# EAGLE board cpu-68000 (EAGLE 9.5.2), part 1 of 2
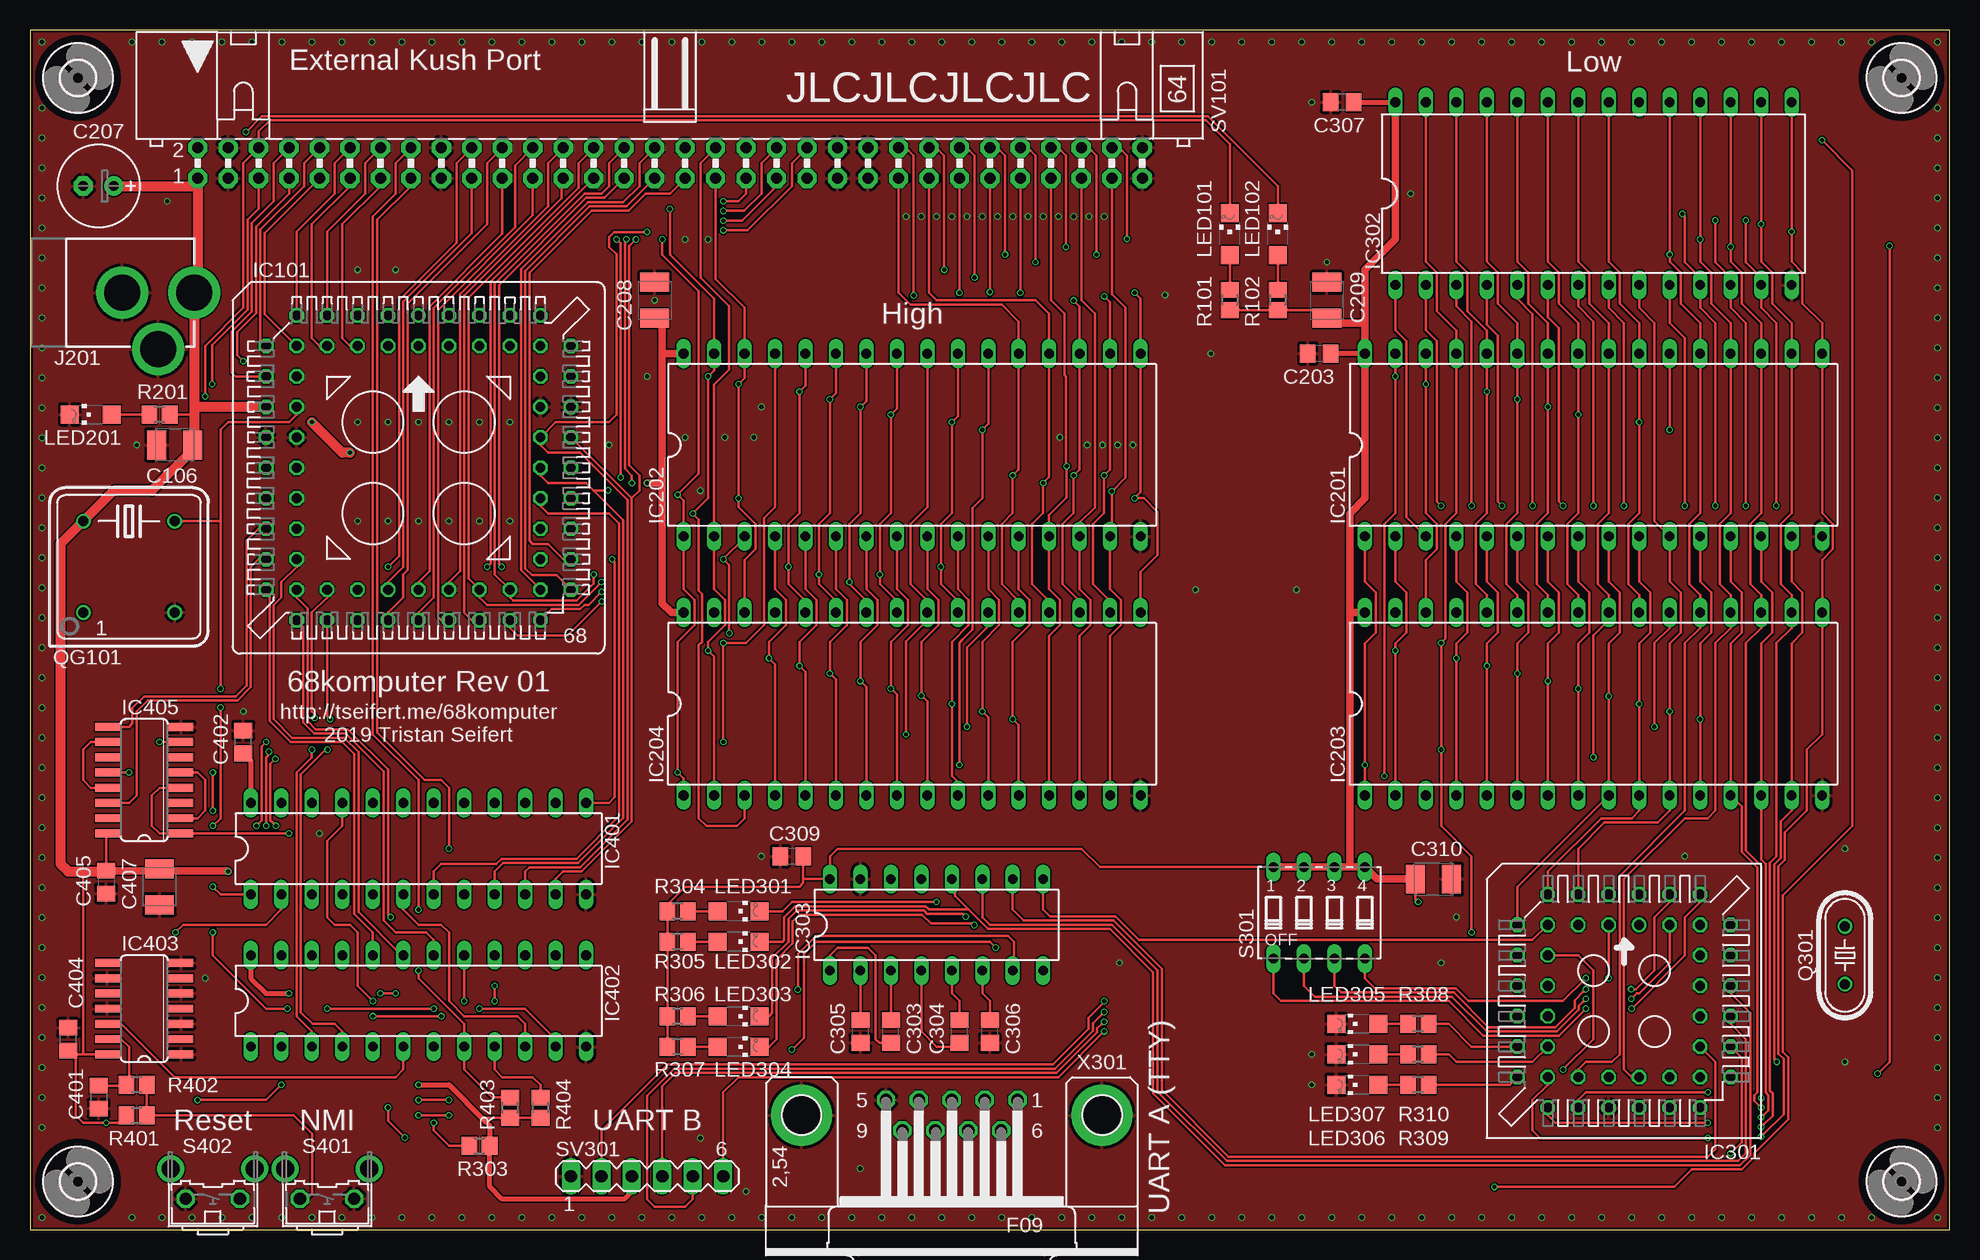
[diagram p0: board, top side]
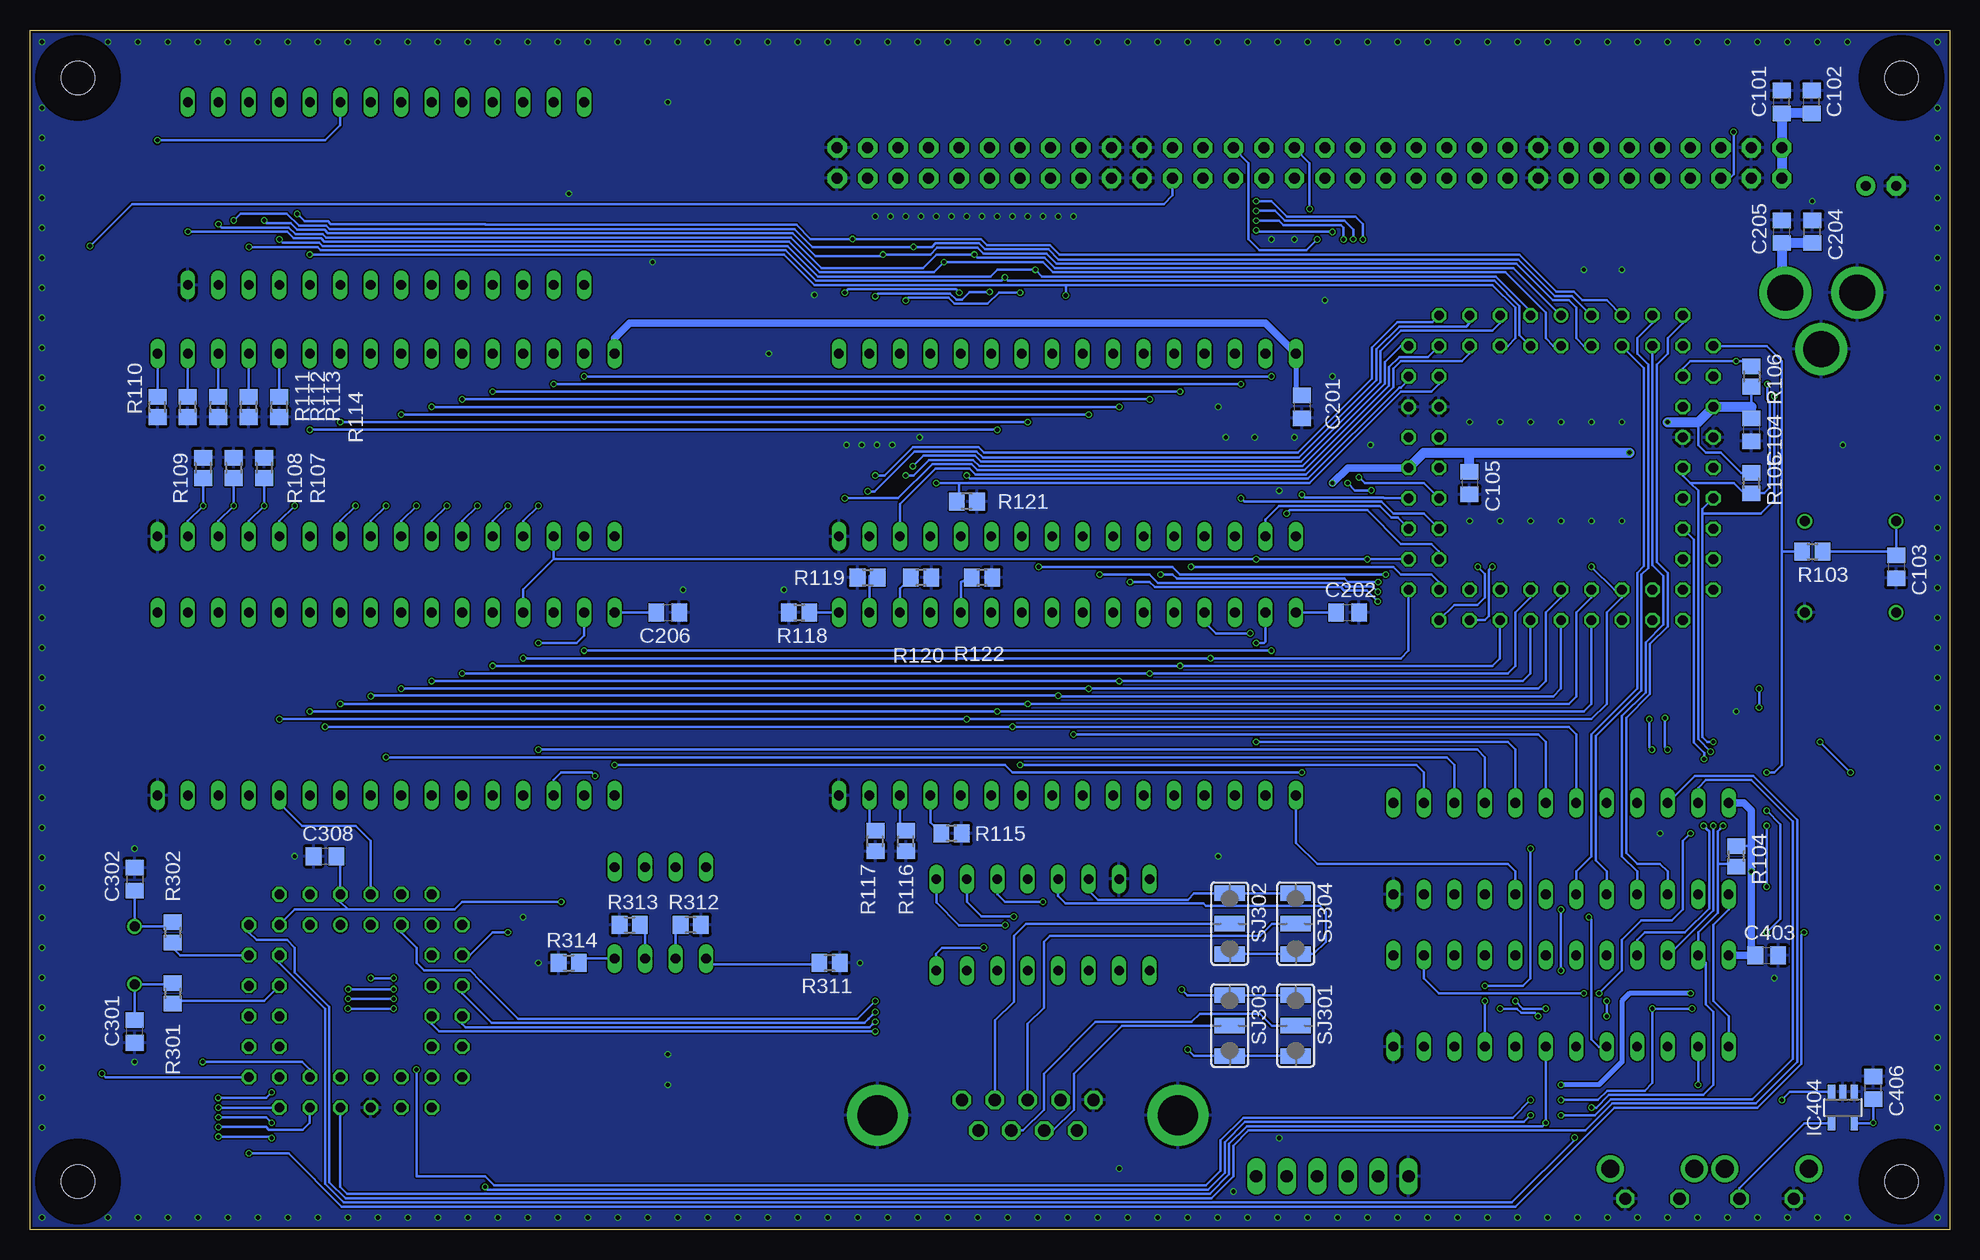
[diagram p1: board, bottom side, seen from below]

Size 160 x 100 mm. Coordinates in mm from the lower left corner, seen from the top.
Outline: 0,0 160,0 160,100 0,100 0,0
Copper layers (1*16): Top 0.035559375mm / dielectric 1.6mm / Bottom 0.035559375mm
Design rules "jlcpcb2layer *": minimum track width 5mil, minimum drill 12mil, track to track 5mil, track to pad 5mil, pad to pad 5mil, via to via 5mil, smd to smd 5mil, copper to edge 8mil, drill to drill 6mil, minimum pad ring 5mil, minimum via ring 3mil, stop-mask expansion 2.5mil, vias tented up to drill 0mil, thermal gap 10mil
Net classes: 0 default: width 0.203 mm

## Footprints (pad centres in the part's own frame; a part is rotated, then mirrored left to right if it is on the bottom)
C0805 = smd 1.3 x 1.5: 1 -0.95,0; 2 0.95,0
SMC_B = smd 1.6 x 2.4: + -1.5,0; - 1.5,0
E2,5-7 = drill 0.813 pad 1.6: + -1.27,0 | drill 0.813 pad 1.6 octagon: - 1.27,0
2,8 = hole 2.8: 0,0
PLCC68SOCK = drill 0.813: 1 0,12.7 | drill 0.813 octagon: 2 0,10.16; 3 -2.54,12.7; 4 -2.54,10.16; 5 -5.08,12.7; 6 -5.08,10.16; 7 -7.62,12.7; 8 -7.62,10.16; 9 -10.16,12.7; 10 -12.7,10.16; 11 -10.16,10.16; 12 -12.7,7.62; 13 -10.16,7.62; 14 -12.7,5.08; 15 -10.16,5.08; 16 -12.7,2.54; 17 -10.16,2.54; 18 -12.7,0; 19 -10.16,0; 20 -12.7,-2.54; 21 -10.16,-2.54; 22 -12.7,-5.08; 23 -10.16,-5.08; 24 -12.7,-7.62; 25 -10.16,-7.62; 26 -12.7,-10.16; 27 -10.16,-12.7; 28 -10.16,-10.16; 29 -7.62,-12.7; 30 -7.62,-10.16; 31 -5.08,-12.7; 32 -5.08,-10.16; 33 -2.54,-12.7; 34 -2.54,-10.16; 35 0,-12.7; 36 0,-10.16; 37 2.54,-12.7; 38 2.54,-10.16; 39 5.08,-12.7; 40 5.08,-10.16; 41 7.62,-12.7; 42 7.62,-10.16; 43 10.16,-12.7; 44 12.7,-10.16; 45 10.16,-10.16; 46 12.7,-7.62; 47 10.16,-7.62; 48 12.7,-5.08; 49 10.16,-5.08; 50 12.7,-2.54; 51 10.16,-2.54; 52 12.7,0; 53 10.16,0; 54 12.7,2.54; 55 10.16,2.54; 56 12.7,5.08; 57 10.16,5.08; 58 12.7,7.62; 59 10.16,7.62; 60 12.7,10.16; 61 10.16,12.7; 62 10.16,10.16; 63 7.62,12.7; 64 7.62,10.16; 65 5.08,12.7; 66 5.08,10.16; 67 2.54,12.7; 68 2.54,10.16
DIL32 = drill 0.813 long: 1 -19.05,-7.62; 2 -16.51,-7.62; 3 -13.97,-7.62; 4 -11.43,-7.62; 5 -8.89,-7.62; 6 -6.35,-7.62; 7 -3.81,-7.62; 8 -1.27,-7.62; 9 1.27,-7.62; 10 3.81,-7.62; 11 6.35,-7.62; 12 8.89,-7.62; 13 11.43,-7.62; 14 13.97,-7.62; 15 16.51,-7.62; 16 19.05,-7.62; 17 19.05,7.62; 18 16.51,7.62; 19 13.97,7.62; 20 11.43,7.62; 21 8.89,7.62; 22 6.35,7.62; 23 3.81,7.62; 24 1.27,7.62; 25 -1.27,7.62; 26 -3.81,7.62; 27 -6.35,7.62; 28 -8.89,7.62; 29 -11.43,7.62; 30 -13.97,7.62; 31 -16.51,7.62; 32 -19.05,7.62
PLCC-S44 = drill 0.813: 1 1.27,6.35 | drill 0.813 octagon: 2 -1.27,8.89; 3 -1.27,6.35; 4 -3.81,8.89; 5 -3.81,6.35; 6 -6.35,8.89; 7 -8.89,6.35; 8 -6.35,6.35; 9 -8.89,3.81; 10 -6.35,3.81; 11 -8.89,1.27; 12 -6.35,1.27; 13 -8.89,-1.27; 14 -6.35,-1.27; 15 -8.89,-3.81; 16 -6.35,-3.81; 17 -8.89,-6.35; 18 -6.35,-8.89; 19 -6.35,-6.35; 20 -3.81,-8.89; 21 -3.81,-6.35; 22 -1.27,-8.89; 23 -1.27,-6.35; 24 1.27,-8.89; 25 1.27,-6.35; 26 3.81,-8.89; 27 3.81,-6.35; 28 6.35,-8.89; 29 8.89,-6.35; 30 6.35,-6.35; 31 8.89,-3.81; 32 6.35,-3.81; 33 8.89,-1.27; 34 6.35,-1.27; 35 8.89,1.27; 36 6.35,1.27; 37 8.89,3.81; 38 6.35,3.81; 39 8.89,6.35; 40 6.35,8.89; 41 6.35,6.35; 42 3.81,8.89; 43 3.81,6.35; 44 1.27,8.89
DIL28-6 = drill 0.813 long: 1 -16.51,-7.62; 2 -13.97,-7.62; 3 -11.43,-7.62; 4 -8.89,-7.62; 5 -6.35,-7.62; 6 -3.81,-7.62; 7 -1.27,-7.62; 8 1.27,-7.62; 9 3.81,-7.62; 10 6.35,-7.62; 11 8.89,-7.62; 12 11.43,-7.62; 13 13.97,-7.62; 14 16.51,-7.62; 15 16.51,7.62; 16 13.97,7.62; 17 11.43,7.62; 18 8.89,7.62; 19 6.35,7.62; 20 3.81,7.62; 21 1.27,7.62; 22 -1.27,7.62; 23 -3.81,7.62; 24 -6.35,7.62; 25 -8.89,7.62; 26 -11.43,7.62; 27 -13.97,7.62; 28 -16.51,7.62
DIL16 = drill 0.813 long: 1 -8.89,-3.81; 2 -6.35,-3.81; 3 -3.81,-3.81; 4 -1.27,-3.81; 5 1.27,-3.81; 6 3.81,-3.81; 7 6.35,-3.81; 8 8.89,-3.81; 9 8.89,3.81; 10 6.35,3.81; 11 3.81,3.81; 12 1.27,3.81; 13 -1.27,3.81; 14 -3.81,3.81; 15 -6.35,3.81; 16 -8.89,3.81
DIL24S = drill 0.813 long: 1 -13.97,-3.81; 2 -11.43,-3.81; 3 -8.89,-3.81; 4 -6.35,-3.81; 5 -3.81,-3.81; 6 -1.27,-3.81; 7 1.27,-3.81; 8 3.81,-3.81; 9 6.35,-3.81; 10 8.89,-3.81; 11 11.43,-3.81; 12 13.97,-3.81; 13 13.97,3.81; 14 11.43,3.81; 15 8.89,3.81; 16 6.35,3.81; 17 3.81,3.81; 18 1.27,3.81; 19 -1.27,3.81; 20 -3.81,3.81; 21 -6.35,3.81; 22 -8.89,3.81; 23 -11.43,3.81; 24 -13.97,3.81
SO14 = smd 0.66 x 2.032: 1 -3.81,-3.073; 2 -2.54,-3.073; 3 -1.27,-3.073; 4 0,-3.073; 5 1.27,-3.073; 6 2.54,-3.073; 7 3.81,-3.073; 8 3.81,3.073; 9 2.54,3.073; 10 1.27,3.073; 11 0,3.073; 12 -1.27,3.073; 13 -2.54,3.073; 14 -3.81,3.073
SOT23-5 = smd 0.6 x 1.2: 1 -0.95,-1.306; 2 0,-1.306; 3 0.95,-1.306; 4 0.95,1.306; 5 -0.95,1.306
SO16 = smd 0.66 x 2.032: 1 -4.445,-3.073; 2 -3.175,-3.073; 3 -1.905,-3.073; 4 -0.635,-3.073; 5 0.635,-3.073; 6 1.905,-3.073; 7 3.175,-3.073; 8 4.445,-3.073; 9 4.445,3.073; 10 3.175,3.073; 11 1.905,3.073; 12 0.635,3.073; 13 -0.635,3.073; 14 -1.905,3.073; 15 -3.175,3.073; 16 -4.445,3.073
POWER_JACK_PTH = drill 2.997 pad 4.318: GND 0,7.7; GNDBREAK 4.7,10.7; PWR 0,13.7
CHIPLED_1206 = smd 1.5 x 1.5: A 0,-1.75; C 0,1.75
HC49/S = drill 0.813: 1 -2.413,0; 2 2.413,0
DIL08S = drill 0.813: 1 -3.81,-3.81; 4 3.81,-3.81; 5 3.81,3.81; 8 -3.81,3.81
R2012 = smd 1.3 x 1.5: 1 -0.85,0; 2 0.85,0
DIP04S = drill 0.813 long: 1 -3.81,-3.81; 2 -1.27,-3.81; 3 1.27,-3.81; 4 3.81,-3.81; 5 3.81,3.81; 6 1.27,3.81; 7 -1.27,3.81; 8 -3.81,3.81
B3F-31XX = drill 1.016 octagon: 1 -2.261,-1.245; 2 2.261,-1.245 | drill 1.499 pad 2.159: 3 -3.505,1.245; 4 3.505,1.245
SJ_2W = smd 1.27 x 2.54: 1 -2.54,0; 2 0,0; 3 2.54,0
ML64L = drill 0.914 pad 1.6 octagon: 1 -39.37,-1.27; 2 -39.37,1.27; 3 -36.83,-1.27; 4 -36.83,1.27; 5 -34.29,-1.27; 6 -34.29,1.27; 7 -31.75,-1.27; 8 -31.75,1.27; 9 -29.21,-1.27; 10 -29.21,1.27; 11 -26.67,-1.27; 12 -26.67,1.27; 13 -24.13,-1.27; 14 -24.13,1.27; 15 -21.59,-1.27; 16 -21.59,1.27; 17 -19.05,-1.27; 18 -19.05,1.27; 19 -16.51,-1.27; 20 -16.51,1.27; 21 -13.97,-1.27; 22 -13.97,1.27; 23 -11.43,-1.27; 24 -11.43,1.27; 25 -8.89,-1.27; 26 -8.89,1.27; 27 -6.35,-1.27; 28 -6.35,1.27; 29 -3.81,-1.27; 30 -3.81,1.27; 31 -1.27,-1.27; 32 -1.27,1.27; 33 1.27,-1.27; 34 1.27,1.27; 35 3.81,-1.27; 36 3.81,1.27; 37 6.35,-1.27; 38 6.35,1.27; 39 8.89,-1.27; 40 8.89,1.27; 41 11.43,-1.27; 42 11.43,1.27; 43 13.97,-1.27; 44 13.97,1.27; 45 16.51,-1.27; 46 16.51,1.27; 47 19.05,-1.27; 48 19.05,1.27; 49 21.59,-1.27; 50 21.59,1.27; 51 24.13,-1.27; 52 24.13,1.27; 53 26.67,-1.27; 54 26.67,1.27; 55 29.21,-1.27; 56 29.21,1.27; 57 31.75,-1.27; 58 31.75,1.27; 59 34.29,-1.27; 60 34.29,1.27; 61 36.83,-1.27; 62 36.83,1.27; 63 39.37,-1.27; 64 39.37,1.27
MA06-1 = drill 1.016 long: 1 -6.35,0; 2 -3.81,0; 3 -1.27,0; 4 1.27,0; 5 3.81,0; 6 6.35,0
F09HP = drill 1.016 octagon: 1 -5.486,-1.27; 2 -2.743,-1.27; 3 0,-1.27; 4 2.743,-1.27; 5 5.486,-1.27; 6 -4.115,1.27; 7 -1.372,1.27; 8 1.372,1.27; 9 4.115,1.27 | drill 3.302 pad 5.08: G1 -12.522,0; G2 12.522,0

## Placement (x,y rotation side)
C101  100nF  [C0805]  14,94 90 bottom
C102  1µF  [C0805]  11.5,94 90 bottom
C103  100nF  [C0805]  4.45,55.24 270 bottom
C104  100nF  [C0805]  16.51,66.67 270 bottom
C105  100nF  [C0805]  40.01,62.23 270 bottom
C106  10µF  [SMC_B]  12.06,65.41 180 top
C201  100nF  [C0805]  53.98,68.58 270 bottom
C202  100nF  [C0805]  50.16,51.44 0 bottom
C203  100nF  [C0805]  107.47,73.03 180 top
C204  1µF  [C0805]  11.43,83.19 90 bottom
C205  100nF  [C0805]  13.97,83.19 90 bottom
C206  100nF  [C0805]  106.83,51.44 0 bottom
C207  220µF  [E2,5-7]  5.71,87 180 top
C208  10µF  [SMC_B]  52.07,77.47 90 top
C209  10µF  [SMC_B]  108.1,77.47 90 top
C301  27pF  [C0805]  151.28,16.51 90 bottom
C302  27pF  [C0805]  151.28,29.21 270 bottom
C303  1µF  [C0805]  71.75,16.51 90 top
C304  1µF  [C0805]  77.47,16.51 90 top
C305  1µF  [C0805]  69.22,16.51 90 top
C306  1µF  [C0805]  80.01,16.51 90 top
C307  100nF  [C0805]  109.37,93.98 180 top
C308  100nF  [C0805]  135.41,31.11 180 bottom
C309  100nF  [C0805]  63.5,31.11 180 top
C310  10µF  [SMC_B]  116.99,29.21 0 top
C401  10µF  [C0805]  5.71,11.05 270 top
C402  100nF  [C0805]  17.78,40.64 90 top
C403  100nF  [C0805]  15.24,22.86 0 bottom
C404  100nF  [C0805]  3.17,15.88 90 top
C405  100nF  [C0805]  6.35,28.96 270 top
C406  100nF  [C0805]  6.35,11.81 90 bottom
C407  10µF  [SMC_B]  10.79,28.57 270 top
H101  MOUNT-HOLE2.8  [2,8]  4,96 0 top
H102  MOUNT-HOLE2.8  [2,8]  4,4 0 top
H103  MOUNT-HOLE2.8  [2,8]  156,96 0 top
H104  MOUNT-HOLE2.8  [2,8]  156,4 0 top
IC101  [PLCC68SOCK]  32.38,63.5 0 top
IC201  AS6C4008  [DIL32]  130.32,65.41 0 top
IC202  AS6C4008  [DIL32]  73.53,65.41 0 top
IC203  39SF040  [DIL32]  130.32,43.81 0 top
IC204  39SF040  [DIL32]  73.53,43.81 0 top
IC301  XR68C681  [PLCC-S44]  132.87,19.05 0 top
IC302  DS1244Y  [DIL28-6]  130.32,86.36 0 top
IC303  MAX232  [DIL16]  75.56,25.4 0 top
IC401  GAL22V10  [DIL24S]  32.38,31.75 0 top
IC402  GAL22V10  [DIL24S]  32.38,19.05 0 top
IC403  74HC14D  [SO14]  9.53,18.41 90 top
IC404  LM3724  [SOT23-5]  8.89,10.16 180 bottom
IC405  74HC175D  [SO16]  9.53,37.47 90 top
J201  POWER_JACK  [POWER_JACK_PTH]  0,78.11 270 top
LED101  [CHIPLED_1206]  100,83 0 top
LED102  [CHIPLED_1206]  104,83 0 top
LED201  [CHIPLED_1206]  5.08,67.94 90 top
LED301  [CHIPLED_1206]  59.05,26.54 270 top
LED302  [CHIPLED_1206]  59.05,24 270 top
LED303  [CHIPLED_1206]  59.05,17.78 270 top
LED304  [CHIPLED_1206]  59.05,15.24 270 top
LED305  [CHIPLED_1206]  110.64,17.14 90 top
LED306  [CHIPLED_1206]  110.64,12.06 90 top
LED307  [CHIPLED_1206]  110.64,14.61 90 top
Q301  3.6864 MHz  [HC49/S]  151.28,22.86 90 top
QG101  8MHz  [DIL08S]  8.26,55.24 0 top
R101  3k  [R2012]  100,77.5 270 top
R102  3k  [R2012]  104,77.5 270 top
R103  10k  [R2012]  11.43,56.52 0 bottom
R104  10k  [R2012]  17.78,31.11 90 bottom
R105  10k  [R2012]  16.51,62.23 90 bottom
R106  10k  [R2012]  16.51,71.12 270 bottom
R107  10k  [R2012]  140.49,63.5 270 bottom
R108  10k  [R2012]  143.03,63.5 270 bottom
R109  10k  [R2012]  145.56,63.5 270 bottom
R110  10k  [R2012]  149.38,68.58 90 bottom
R111  10k  [R2012]  146.84,68.58 90 bottom
R112  10k  [R2012]  144.29,68.58 90 bottom
R113  10k  [R2012]  141.75,68.58 90 bottom
R114  10k  [R2012]  139.22,68.58 90 bottom
R115  10k  [R2012]  83.19,33.02 180 bottom
R116  10k  [R2012]  87,32.38 90 bottom
R117  10k  [R2012]  89.53,32.38 90 bottom
R118  10k  [R2012]  95.89,51.44 0 bottom
R119  10k  [R2012]  90.17,54.36 0 bottom
R120  10k  [R2012]  85.72,54.36 180 bottom
R121  10k  [R2012]  81.92,60.71 180 bottom
R122  10k  [R2012]  80.64,54.36 180 bottom
R201  3k  [R2012]  10.79,67.94 180 top
R301  100R  [R2012]  148.1,19.68 270 bottom
R302  100R  [R2012]  148.1,24.77 270 bottom
R303  10k  [R2012]  37.47,6.99 0 top
R304  3k  [R2012]  53.98,26.54 180 top
R305  3k  [R2012]  53.98,24 180 top
R306  3k  [R2012]  53.98,17.78 180 top
R307  3k  [R2012]  53.98,15.24 180 top
R308  3k  [R2012]  115.72,17.14 180 top
R309  3k  [R2012]  115.72,12.06 180 top
R310  3k  [R2012]  115.72,14.61 180 top
R311  10k  [R2012]  93.34,22.23 180 bottom
R312  10k  [R2012]  104.92,25.4 180 bottom
R313  10k  [R2012]  110,25.4 0 bottom
R314  10k  [R2012]  115.08,22.23 0 bottom
R401  10k  [R2012]  8.89,9.53 0 top
R402  100R  [R2012]  8.89,12.06 180 top
R403  10k  [R2012]  40.01,10.16 270 top
R404  10k  [R2012]  42.55,10.16 270 top
S301  [DIP04S]  107.47,26.4 0 top
S401  [B3F-31XX]  24.77,3.81 0 top
S402  [B3F-31XX]  15.24,3.81 0 top
SJ301  [SJ_2W]  54.5,17 270 bottom
SJ302  [SJ_2W]  60,25.5 270 bottom
SJ303  [SJ_2W]  60,17 270 bottom
SJ304  [SJ_2W]  54.5,25.5 270 bottom
SV101  [ML64L]  53.34,88.9 0 top
SV301  [MA06-1]  51.44,4.45 0 top
X301  [F09HP]  76.83,9.53 180 top

## Library data of the parts
C101 C103-C105 C201-C203 C205 C206 C307-C309 C402-C406 = rcl; MOUSER: 710-885012207072; SPICEPREFIX: C
C102 C303-C306 = rcl; MOUSER: 710-885012207078; SPICEPREFIX: C
C106 C208 C209 C310 C407 = rcl; MOUSER: 581-TAJB106K020RNJV; SPICEPREFIX: C
C204 = rcl; MOUSER: 710-885012107015; SPICEPREFIX: C
C207 = rcl; MOUSER: 710-860020373010; SPICEPREFIX: C
C301 C302 = rcl; MOUSER: 80-C0805C270K5HACTU; SPICEPREFIX: C
C401 = rcl; MOUSER: 791-0805F106Z100CT; SPICEPREFIX: C
H101-H104 = holes
IC101 = 68komputer; MOUSER_SOCKET: 940-44-068-24-000000; OC_FARNELL: unknown; OC_NEWARK: unknown
IC201 IC202 = 68komputer; MOUSER: 913-AS6C4008-55PCN; MOUSER_SOCKET: 575-1144632
IC203 IC204 = 68komputer; MOUSER: 804-39SF0407CPHE; MOUSER_SOCKET: 575-1144632
IC301 = 68komputer; MOUSER: 701-XR68C681CJ-F; MOUSER_SOCKET: 940-44-044-24-000000
IC302 = Parts; MOUSER: 700-DS1244Y-70; MOUSER_SOCKET: 575-1104762841001000
IC303 = maxim; MF: MAXIM; MOUSER: 595-MAX232ECN; MOUSER_SOCKET: 575-1104731641001000; MPN: MAX232ACPE+; OC_FARNELL: 9723773; OC_NEWARK: 68K4544
IC401 IC402 = 68komputer; MOUSER_SOCKET: 575-1104732441001000
IC403 = 74xx-eu; MOUSER: 771-74HC14D-T
IC404 = 68komputer; MOUSER: 926-LM3724IM5463NOPB
IC405 = 74xx-eu; MOUSER: 595-CD74HCT175M
J201 = SparkFun-Connectors; PROD_ID: CONN-08197
LED101 LED102 = led; MOUSER: 710-156120RS75300
LED201 = led; MOUSER: 710-156120YS75300
LED301-LED307 = led; MOUSER: 710-156120VS75300
Q301 = crystal; MOUSER: 815-ABL-3.6864-B2; OC_FARNELL: 1667008; OC_NEWARK: unknown
QG101 = crystal; MOUSER: 774-MXO45HS-3C-8.0; MOUSER_SOCKET: 535-1108800; OC_FARNELL: unknown; OC_NEWARK: unknown
R101 R102 R201 R304-R310 = rcl; MOUSER: 652-CR0805JW-302ELF; SPICEPREFIX: R
R103-R122 R303 R311-R314 R401 R403 R404 = rcl; MOUSER: 652-CR0805FX-1002ELF; SPICEPREFIX: R
R301 R302 = rcl; MOUSER: 652-CR0805FX-1000ELF; SPICEPREFIX: R
R402 = rcl; MOUSER: 652-CR0805JW-101ELF; SPICEPREFIX: R
S301 = switch-dil; MOUSER: 653-A6FR-4104; OC_FARNELL: unknown; OC_NEWARK: unknown
S401 = switch-omron; MOUSER: 653-B3F-3150; MPN: B3F-3100; OC_FARNELL: 959704; OC_NEWARK: 36M3582; SPICEPREFIX: S
S402 = switch-omron; MOUSER: 653-B3F-3150; MPN: B3F-3100; OC_FARNELL: 959704; OC_NEWARK: 36M3582
SJ301-SJ304 = jumper
SV101 = con-harting-ml; OC_FARNELL: unknown; OC_NEWARK: unknown
SV301 = con-lstb; OC_FARNELL: unknown; OC_NEWARK: unknown
X301 = con-subd; MOUSER: 806-K22X-E9P-N-99; OC_FARNELL: unknown; OC_NEWARK: unknown

## Nets
68681_X1: IC301.36 R301.2
68681_X2: IC301.37 R302.2
!68681_CS: IC301.39 IC401.22
!68681_IRQ: IC301.24 IC402.7 R303.1
!A_CTS: IC301.8 IC303.9 LED304.C
!A_RTS: IC301.32 IC303.10 LED303.C
!ADDR_GOOD: IC401.21 IC402.11
!AS: IC101.6 IC401.6 IC402.10 SV101.13
!B_CTS: IC301.5 SV301.2
!B_RTS: IC301.14 SV301.6
!BERR: IC101.24 IC405.14
!BERR_TIMER_CLR: IC402.14 IC405.1 IC405.4
!BG: IC101.11 SV101.9
!BGACK: IC101.12 SV101.8
!BR: IC101.13 R106.1 SV101.7
!DTACK: IC101.10 IC301.10 IC402.17 R103.1 SV101.10
!EXT_ID: IC301.29 SV101.41
!EXTI_A: IC402.8 R403.1 SV101.16
!EXTI_B: IC402.9 R404.1 SV101.15
!HALT: IC101.19 IC402.22 LED102.C R105.1 SV101.5
!IPL0: IC101.27 IC402.18
!IPL1: IC101.26 IC402.20
!IPL2: IC101.25 IC402.19
!LDS: IC101.8 IC401.4 SV101.11
!LOE: IC201.24 IC203.24 IC302.22 IC401.15
!LWE: IC201.29 IC203.31 IC301.9 IC302.27 IC401.16
!MR: IC404.4 S402.2
!NMI: IC402.6 IC403.12
!RAM_CS: IC201.22 IC202.22 IC401.14
!RESET: IC101.20 IC301.38 IC402.23 LED101.C R104.1 SV101.6
!RESET_IN: IC402.2 IC404.3
!ROM_CS: IC203.22 IC204.22 IC401.19
!RTC_CS: IC302.20 IC401.23
!UDS: IC101.7 IC401.5 SV101.14
!UOE: IC202.24 IC204.24 IC401.18
!UWE: IC202.29 IC204.31 IC401.17
!VMA: IC101.21
!VPA: IC101.23 IC402.21
+5V: C101.1 C102.1 C103.1 C104.1 C105.1 C106.+ C201.1 C202.1 C203.1 C204.1 C205.1 C206.1 C207.+ C208.+ C209.+ C307.1 C308.1 C309.1 C310.+ C402.1 C403.1 C404.1 C405.1 C406.1 C407.+ IC101.14 IC101.52 IC201.32 IC202.32 IC203.32 IC204.32 IC301.41 IC301.44 IC302.28 IC303.16 IC401.24 IC402.24 IC403.14 IC404.5 IC405.16 J201.PWR QG101.8 R101.2 R102.2 R103.2 R104.2 R105.2 R106.2 R201.1 R303.2 R304.2 R305.2 R306.2 R307.2 R401.1 R403.2 R404.2 S301.5 S301.6 S301.7 S301.8 SV101.1 SV101.2 SV301.3
A1: IC101.32 IC201.12 IC202.12 IC203.12 IC204.12 IC301.2 IC302.10 SV101.20
A2: IC101.33 IC201.11 IC202.11 IC203.11 IC204.11 IC301.4 IC302.9 SV101.22
A3: IC101.34 IC201.10 IC202.10 IC203.10 IC204.10 IC301.6 IC302.8 SV101.19
A4: IC101.35 IC201.9 IC202.9 IC203.9 IC204.9 IC301.7 IC302.7 SV101.24
A5: IC101.36 IC201.8 IC202.8 IC203.8 IC204.8 IC302.6 SV101.21
A6: IC101.37 IC201.7 IC202.7 IC203.7 IC204.7 IC302.5 SV101.23
A7: IC101.38 IC201.6 IC202.6 IC203.6 IC204.6 IC302.4 SV101.26
A8: IC101.39 IC201.5 IC202.5 IC203.5 IC204.5 IC302.3 SV101.25
A9: IC101.40 IC201.27 IC202.27 IC203.27 IC204.27 IC302.25 SV101.28
A10: IC101.41 IC201.26 IC202.26 IC203.26 IC204.26 IC302.24 SV101.27
A11: IC101.42 IC201.23 IC202.23 IC203.23 IC204.23 IC302.21 SV101.30
A12: IC101.43 IC201.25 IC202.25 IC203.25 IC204.25 IC302.23 SV101.29
A13: IC101.44 IC201.4 IC202.4 IC203.4 IC204.4 IC302.2 SV101.31
A14: IC101.45 IC201.28 IC202.28 IC203.28 IC204.28 IC302.26 SV101.32
A15: IC101.46 IC201.3 IC202.3 IC203.29 IC204.29 IC302.1 IC401.13 SV101.33
A16: IC101.47 IC201.31 IC202.31 IC203.3 IC204.3 SV101.34
A17: IC101.48 IC201.2 IC202.2 IC203.2 IC204.2 SV101.36
A18: IC101.49 IC201.30 IC202.30 IC203.30 IC204.30 SV101.35
A19: IC101.50 IC201.1 IC202.1 IC203.1 IC204.1 IC401.8 SV101.38
A20: IC101.51 IC401.7 SV101.37
A21: IC101.53 IC401.9 SV101.40
A22: IC101.54 IC401.11 SV101.39
A23: IC101.55 IC401.10 SV101.42
A_RX: IC301.35 IC303.12 LED302.C
A_TX: IC301.33 IC303.11 LED301.C
B_RX: IC301.11 SV301.5
B_TX: IC301.13 SV301.4
CLK: IC101.15 IC401.1 IC402.1 QG101.5
COM0_CTS: IC303.8 SJ301.3 SJ303.3
COM0_CTS_PIN: SJ303.2 X301.8
COM0_RTS: IC303.7 SJ301.1 SJ303.1
COM0_RTS_PIN: SJ301.2 X301.7
COM0_RX: IC303.13 SJ302.3 SJ304.3
COM0_RX_PIN: SJ302.2 X301.2
COM0_TX: IC303.14 SJ302.1 SJ304.1
COM0_TX_PIN: SJ304.2 X301.3
CONF0: IC301.40 R311.2 S301.1
CONF1: IC301.43 R312.2 S301.2
CONF2: IC301.42 R313.2 S301.3
CONF3: IC301.3 R314.2 S301.4
D0: IC101.5 IC201.13 IC203.13 IC301.28 IC302.11 R107.2 SV101.62
D1: IC101.4 IC201.14 IC203.14 IC301.18 IC302.12 R108.2 SV101.60
D2: IC101.3 IC201.15 IC203.15 IC301.27 IC302.13 R109.2 SV101.58
D3: IC101.2 IC201.17 IC203.17 IC301.19 IC302.15 R110.2 SV101.56
D4: IC101.1 IC201.18 IC203.18 IC301.26 IC302.16 R111.2 SV101.54
D5: IC101.68 IC201.19 IC203.19 IC301.20 IC302.17 R112.2 SV101.52
D6: IC101.67 IC201.20 IC203.20 IC301.25 IC302.18 R113.2 SV101.50
D7: IC101.66 IC201.21 IC203.21 IC301.21 IC302.19 R114.2 SV101.48
D8: IC101.65 IC202.13 IC204.13 R115.2 SV101.57
D9: IC101.64 IC202.14 IC204.14 R116.2 SV101.59
D10: IC101.63 IC202.15 IC204.15 R117.2 SV101.61
D11: IC101.62 IC202.17 IC204.17 R118.2 SV101.55
D12: IC101.61 IC202.18 IC204.18 R119.2 SV101.53
D13: IC101.60 IC202.19 IC204.19 R120.2 SV101.51
D14: IC101.59 IC202.20 IC204.20 R121.2 SV101.49
D15: IC101.58 IC202.21 IC204.21 R122.2 SV101.47
E: IC101.22 IC405.9
FC0: IC101.30 IC402.3
FC1: IC101.29 IC402.4
FC2: IC101.28 IC402.5
GND: C101.2 C102.2 C103.2 C104.2 C105.2 C106.- C201.2 C202.2 C203.2 C204.2 C205.2 C206.2 C207.- C208.- C209.- C301.1 C302.1 C305.1 C306.1 C307.2 C308.2 C309.2 C310.- C401.2 C402.2 C403.2 C404.2 C405.2 C406.2 C407.- IC101.16 IC101.17 IC101.56 IC101.57 IC201.16 IC202.16 IC203.16 IC204.16 IC301.22 IC302.14 IC303.15 IC401.12 IC402.12 IC403.1 IC403.3 IC403.5 IC403.7 IC403.9 IC403.11 IC404.1 IC404.2 IC405.8 J201.GND J201.GNDBREAK LED201.C LED305.C LED306.C LED307.C QG101.4 R107.1 R108.1 R109.1 R110.1 R111.1 R112.1 R113.1 R114.1 R115.1 R116.1 R117.1 R118.1 R119.1 R120.1 R121.1 R122.1 R311.1 R312.1 R313.1 R314.1 S401.2 S402.1 SV101.3 SV101.4 SV101.17 SV101.18 SV101.43 SV101.44 SV101.45 SV101.46 SV101.63 SV101.64 SV301.1 X301.5 X301.G1 X301.G2
N$1: C305.2 IC303.2
N$2: C301.2 Q301.1 R301.1
N$3: C302.2 Q301.2 R302.1
N$4: LED201.A R201.2
N$5: IC405.2 IC405.5
N$6: IC405.7 IC405.12
N$7: LED306.A R309.2
N$8: IC405.10 IC405.13
N$9: LED307.A R310.2
N$10: LED305.A R308.2
N$11: R401.2 R402.1 S401.1
N$12: LED301.A R304.1
N$13: C401.1 IC403.13 R402.2
N$14: LED302.A R305.1
N$15: LED303.A R306.1
N$16: LED304.A R307.1
N$17: C306.2 IC303.6
N$18: LED101.A R101.1
N$19: LED102.A R102.1
N$24: C304.1 IC303.4
N$25: C303.1 IC303.1
N$26: C303.2 IC303.3
N$27: C304.2 IC303.5
R/!W!: IC101.9 IC401.3 SV101.12
REMAP: IC301.31 IC401.2
STATUS0: IC301.16 R310.1
STATUS1: IC301.17 R309.1
STATUS2: IC301.15 R308.1